# Altium PCB KNX-MultiExt.PcbDoc
Units mm, origin at the board's own origin, x right, y up, seen from the top; angles counter-clockwise.
Board outline 41.3 x 56.2 mm, 2 copper layers (Top Layer, Bottom Layer); 40 components, 27 nets, 123 pads, 29 vias.
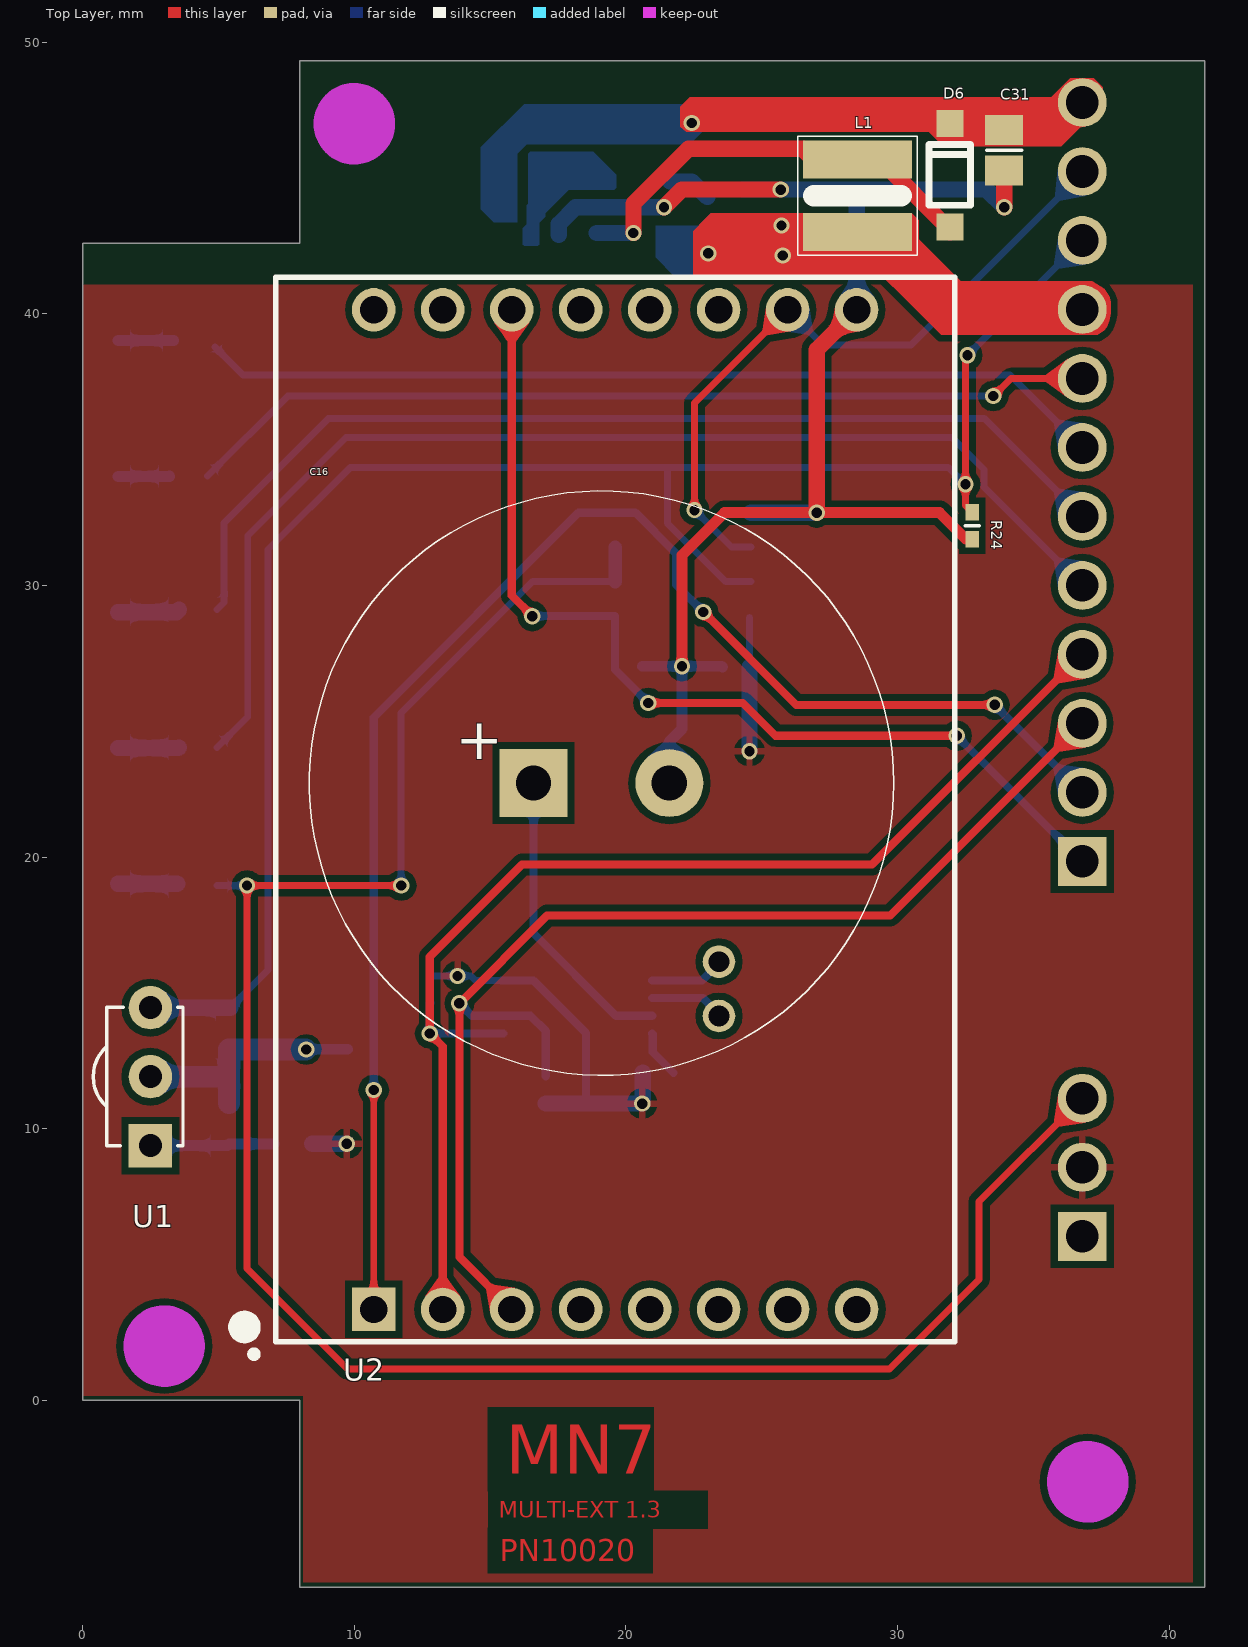
[diagram p0: Top Layer view]
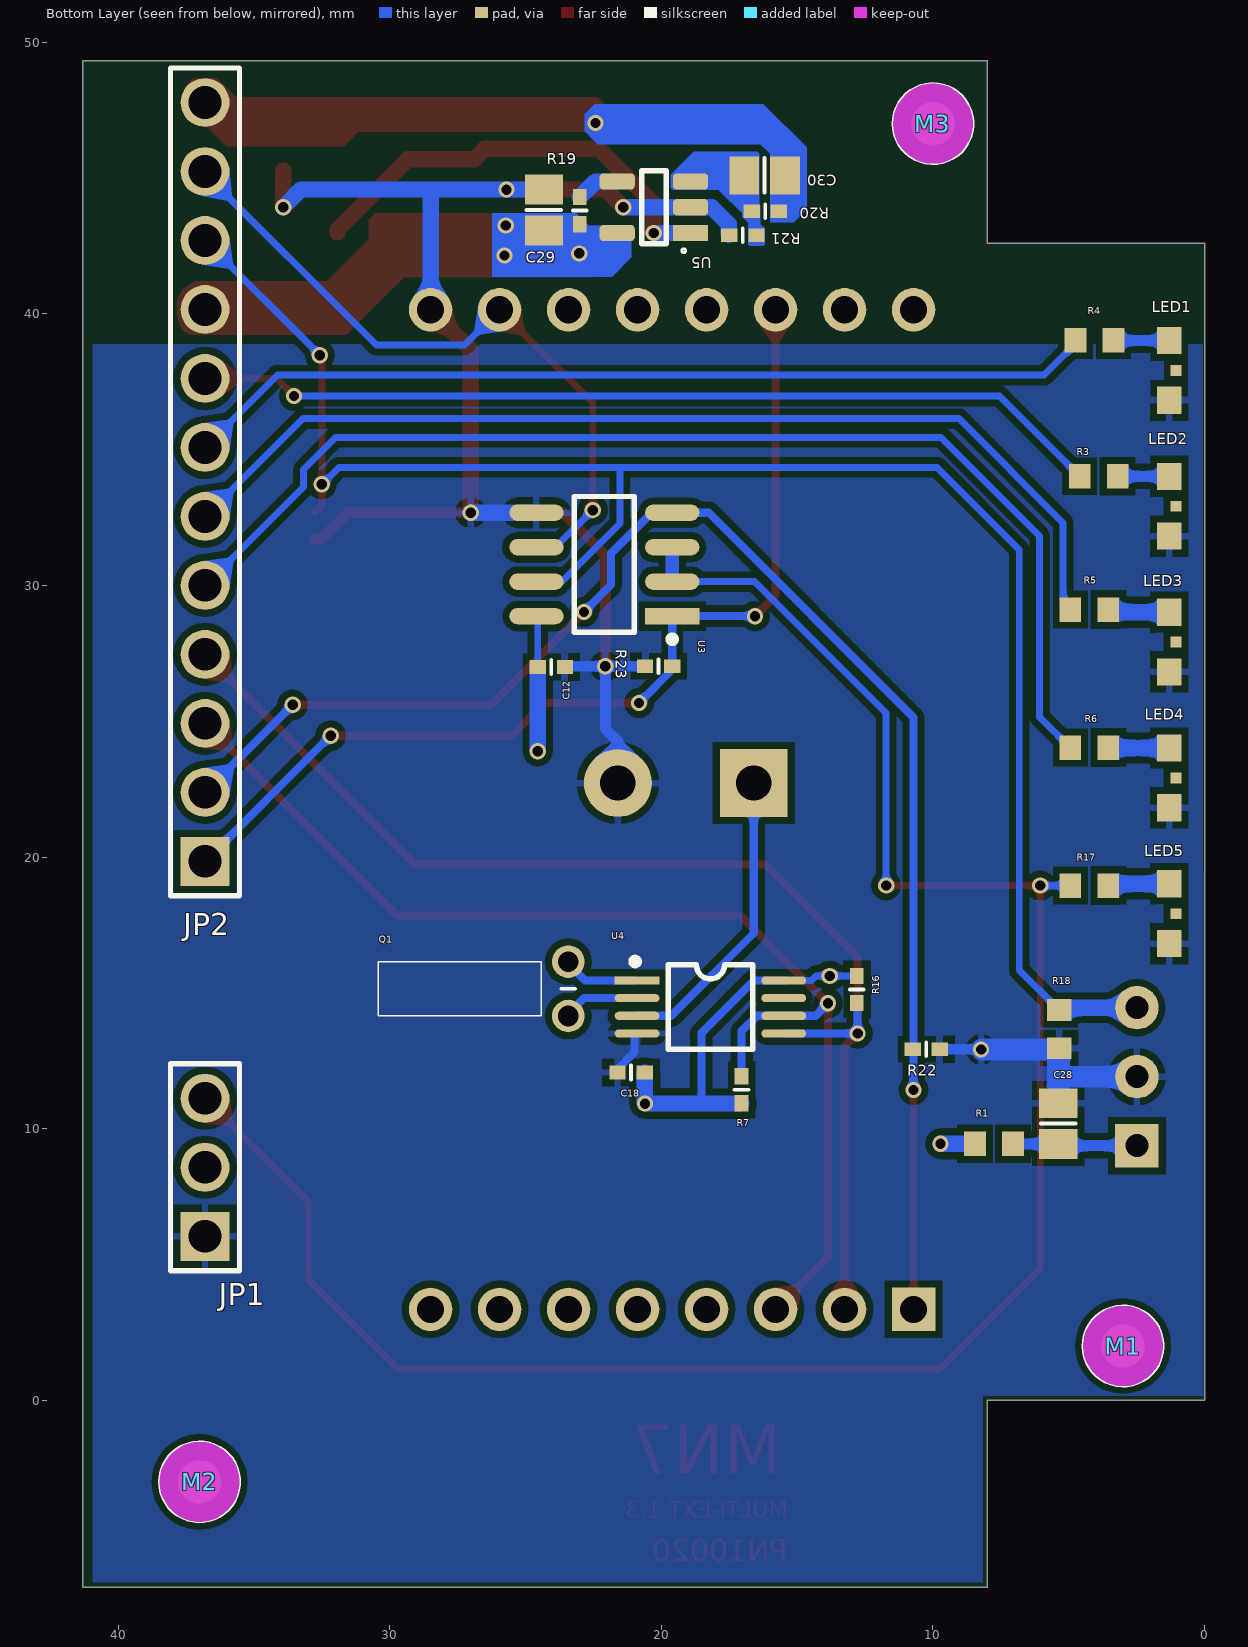
[diagram p1: Bottom Layer view, seen from below]
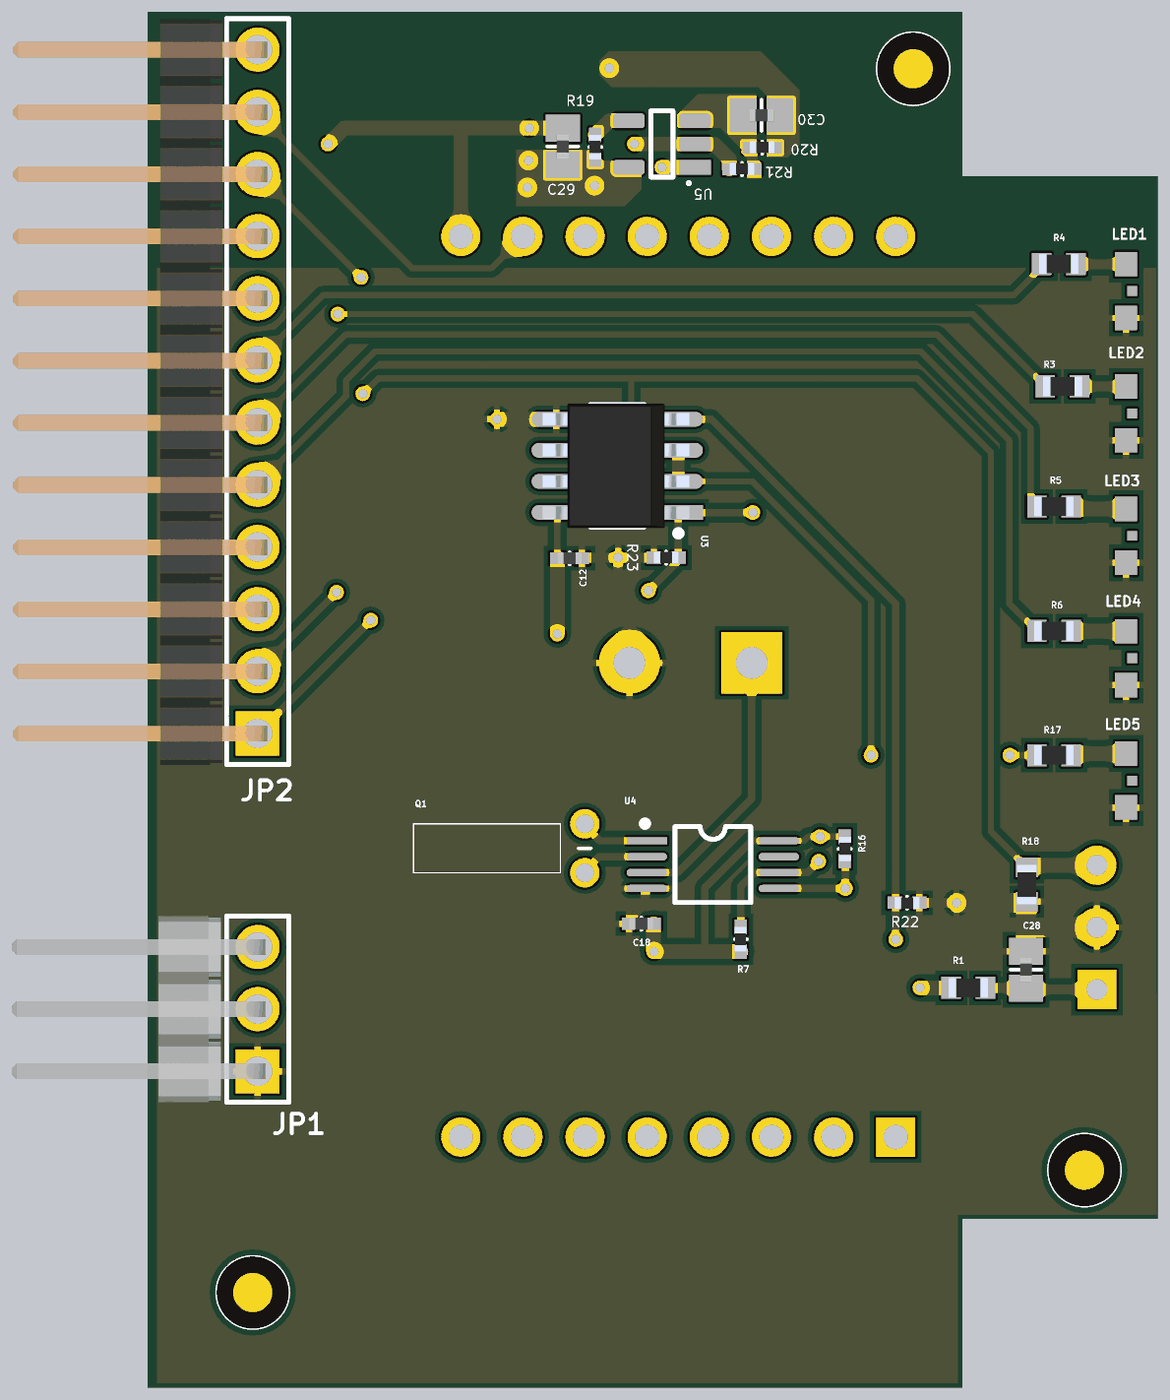
[diagram p2: 3D render of the assembled board from below, using the file's embedded part models]

## Layer stack, top to bottom
Top Solder: solder mask 0.0102, Solder Resist, Dk 3.5
Top Layer: signal copper 0.0356
Dielectric 1: dielectric 0.32, FR-4, Dk 4.8
Bottom Layer: signal copper 0.0356
Bottom Solder: solder mask 0.0102, Solder Resist, Dk 3.5

## Board outline
0,0 8,0 8,-6.883 41.304,-6.883 41.304,49.32 8,49.32 8,42.602 0,42.602

## Design rules (kind name [scope] priority, off if disabled: settings)
Clearance [All] p1: gap=0.254
ComponentClearance ComponentClearance_1 [(HasFootprint('KIMaip') AND HasFootprint('Goldcap_B'))] p1: gap=0 collisioncheckmode=3 verticalgap=0 showdistances=FALSE
ComponentClearance [All] p2: gap=0 collisioncheckmode=3 verticalgap=0 showdistances=FALSE
MinimumSolderMaskSliver [All] p1: minsoldermaskwidth=0.127
PolygonConnect [All] p1: connectstyle=Relief reliefconductorwidth=0.254 reliefentries=4 polygonreliefangle="90 Angle" airgapwidth=0.254
RoomDefinition KNX-MultiExt [InComponentClass('KNX-MultiExt')] p1: confinementstyle=ConfineIn formatcopy=TRUE lockcomponents=FALSE outline -2.8,-8.275 47.25,-8.275 47.25,51.425 -2.8,51.425
RoomDefinition KNX-MultiExt_2 [InComponentClass('KNX-MultiExt_2')] p2: confinementstyle=ConfineIn formatcopy=TRUE lockcomponents=FALSE outline -3.35,-9.775 45.925,-9.775 45.925,50.625 -3.35,50.625
RoutingVias [All] p1: holewidth=0.711 width=1.27 viastyle="Through Hole" minholewidth=0.25 minwidth=0.5 maxholewidth=0.711 maxwidth=1.27
SilkToBoardRegionClearance [(HasFootprint('Mark-3mm') AND IsEmbeddedBoard)] p1:
SilkToSilkClearance [All] p1: silktosilkclearance=0.2
SilkToSolderMaskClearance [IsPad] p1: minsilkscreentomaskgap=0.1 clearancetoexposedcopper=TRUE
SolderMaskExpansion [All] p1: expansion=0.102
Width [All] p1: maxlimit=1 minlimit=0.254 preferedwidth=0.6
25 further rules are at their usual default settings.

## Classes and differential pairs
component class KNX-MultiExt_2: C12 C16 C18 Q1 R7 R16 R18 R22 R23 R24 U2 U3 U4
component class KNX-MultiExt: C28 C29 C30 C31 D6 JP1 JP2 L1 LED1 LED2 LED3 LED4 LED5 M1 M2 M3 R1 R3 R4 R5 R6 R17 R19 R20 R21 U1 U5

## Components (designator, comment, footprint, x,y, rotation, side; value= is the part's Value field where it differs from the comment)
C12 "100nF25V_0402" C0402 24.05,27 r180 bottom
C16 "1F5_5V5_POL" Goldcap_B 19.1,22.725 r0 top locked
C18 "100nF25V_0402" C0402 21.114,12.069 r0 bottom
C28 "47u6V3_0805" C0805 5.388,10.189 r90 bottom
C29 "4u7F25V_0805_Murata" C0805 24.325,43.825 r90 bottom
C30 "82pF50V_0805" C0805 16.2,45.1 r180 bottom
C31 "4u7F25V_0805" C0805 33.925,46.025 r270 top
D6 "MBR0530T1G" SOD123 31.925,45.1 r90 top
JP1 "Plug_3_90_2.54" HDR1X3-DOWN 36.8,8.578 r90 bottom locked
JP2 "Plug_12_90_2.54" HDR1X12_2.54-Down 36.8,33.811 r90 bottom locked
L1 "15uH-WE-TPC" WE-TPC-3816 28.525,44.35 r90 top
LED1 "HSMG-120-Y" HSMA-120-OR 1.3,37.917 r270 bottom
LED2 "HSMG-120-GR" HSMA-120-G 1.3,32.917 r270 bottom
LED3 "HSMG-120-Y" HSMA-120-OR 1.3,27.917 r270 bottom
LED4 "HSMG-120-Y" HSMA-120-OR 1.3,22.917 r270 bottom
LED5 "HSMG-120-Y" HSMA-120-OR 1.3,17.917 r270 bottom
M1 "PasteMark" Mark-3mm 3,2 r180 bottom
M2 "PasteMark" Mark-3mm 37,-3 r180 bottom
M3 "PasteMark" Mark-3mm 10,47 r180 bottom
Q1 "Crystal_32k768Hz" VT-200 23.425,15.15 r180 bottom
R1 "47R_0603" R0603(1608) 7.75,9.45 r0 bottom
R3 "82R_0603" R0603(1608) 3.9,34.025 r0 bottom
R4 "82R_0603" R0603(1608) 4.05,39.025 r0 bottom
R5 "82R_0603" R0603(1608) 4.245,29.112 r0 bottom
R6 "82R_0603" R0603(1608) 4.245,24.032 r0 bottom
R7 "4k7_0402" R0402 17.05,11.434 r90 bottom
R16 "4k7_0402" R0402 12.8,15.125 r270 bottom
R17 "82R_0603" R0603(1608) 4.245,18.952 r0 bottom
R18 "0R_0603" R0603(1608) 5.354,13.667 r270 bottom
R19 "51k1_0402" R0402 23,43.8 r90 bottom
R20 "249k_0402" R0402 16.175,43.775 r180 bottom
R21 "13k3_0402" R0402 17,42.9 r180 bottom
R22 "47k_0402" R0402 10.25,12.925 r0 bottom
R23 "47k_0402" R0402 20.1,27.025 r180 bottom
R24 "47k_0402" R0402 32.75,32.2 r90 top
U1 "GP1UX301QS" IR-GP 2.492,11.917 r270 top
U2 "KIMaip" KIMaip 19.605,21.75 r90 top locked
U3 "ADM3483ARZ" SOIC8_N 22.1,30.775 r90 bottom
U4 "DS1339U-33" uSOP8 18.193,14.482 r270 bottom
U5 "LM2733XMF" PDSO-G5 20.275,43.925 r0 bottom

## Footprints (in the part's own frame and the unit in brackets; to place one, negate y for a bottom-side part, rotate by r counter-clockwise, add the part's x,y. Pads: shape width x height; smd on the part's side, far side on the other; paste and mask are expansions set on the pad)
C0402 [mm] "Chip Capacitor, Body 1.0x0.5mm, IPC High Density"
  rect 0.6x0.5 smd: 1(-0.5,0) 2(0.5,0)
  silkscreen extent 0,-0.25 0,0.25, body extent -0.5,-0.25 0.5,0.25, height 0.5
C0805 [mm] "Chip Capacitor, Body 2.0x1.3mm, IPC High Density"
  rect 1.1x1.4 smd: 1(-0.75,0) 2(0.75,0)
  silkscreen extent 0,-0.64 0,0.64, body extent -0.5,-0.25 0.5,0.25, height 0.5
Goldcap_B [mm] "Capacitor, Body 21.5x9.5mm, IPC High Density"
  rect 2.5x2.5 hole 1.3: 1(-2.5,0)
  round 2.5 hole 1.3: 2(2.5,0)
  silkscreen extent -10.75,-10.76 10.76,10.76, body extent -10.67,-10.73 10.75,10.73, height 8
HDR1X3-DOWN [mm] "Connector; Header; 3 Position"
  rect 1.8x1.8 hole 1.2: 1(-2.54,0)
  round 1.8 hole 1.2: 2(0,0) 3(2.54,0)
  silkscreen extent -3.81,-1.27 3.81,1.27, body extent -3.81,-0.31 3.81,10.05, height 2.57
HDR1X12_2.54-Down [mm] "Connector; Header; 11 Position"
  rect 1.8x1.8 hole 1.2: 1(-13.97,0)
  round 1.8 hole 1.2: 2(-11.43,0) 3(-8.89,0) 4(-6.35,0) 5(-3.81,0) 6(-1.27,0) 7(1.27,0) 8(3.81,0) 9(6.35,0) 10(8.89,0) 11(11.43,0) 12(13.97,0)
  silkscreen extent -15.24,-1.27 15.24,1.27, body extent -15.25,-0.38 15.23,9.98, height 2.62
HSMA-120-G [mm] "GREEN"
  rect 1x0.9 smd: 1(1.1,0) 2(-1.1,0)
  rect 0.4x0.4 smd: 3(0,0.25)
  body extent -0.8,-0.2 0.8,0.85, height 0.6
HSMA-120-OR [mm] "OR"
  rect 1x0.9 smd: 1(1.1,0) 2(-1.1,0)
  rect 0.4x0.4 smd: 3(0,0.25)
  body extent -0.8,-0.2 0.8,0.85, height 0.6
IR-GP [mm]
  rect 1.6x1.6 hole 0.85: 1(2.54,0)
  round 1.6 hole 0.85: 2(0,0) 3(-2.54,0)
  silkscreen extent -2.55,-2.11 2.55,1.2, body extent -2.54,-1.6 2.54,1.2, height 8
KIMaip [mm]
  rect 1.6x1.6 hole 1: 1(-18.4,8.89)
  round 1.6 hole 1: 2(-18.4,6.35) 3(-18.4,3.81) 4(-18.4,1.27) 5(-18.4,-1.27) 6(-18.4,-3.81) 7(-18.4,-6.35) 8(-18.4,-8.89) 9(18.4,-8.89) 10(18.4,-6.35) 11(18.4,-3.81) 12(18.4,-1.27) 13(18.4,1.27) 14(18.4,3.81) 15(18.4,6.35) 16(18.4,8.89)
  silkscreen extent -20.17,-12.5 19.6,13.95, body extent -19.6,-12.55 19.6,12.55, height 8.5
Mark-3mm [mm]
  round 1.6 smd paste-2: 0(0,0)
  Keep-Out Layer circle w2: c0,0 r0.5
  silkscreen extent -1.5,-1.5 1.5,1.5
PDSO-G5 [mm]
  rect 1.3x0.6 smd: 1(-1.35,0.95)
  rrect50% 1.3x0.6 smd: 2(-1.35,0) 3(-1.35,-0.95) 4(1.35,-0.95) 5(1.35,0.95)
  silkscreen extent -1.17,-1.35 0.45,1.67, body extent -0.85,-1.35 0.85,1.35, height 0.7
R0402 [mm] "Chip Resistor, Body 1.0x0.5mm"
  rect 0.6x0.5 smd: 1(-0.5,0) 2(0.5,0)
  silkscreen extent 0,-0.25 0,0.25, body extent -0.5,-0.24 0.5,0.26, height 0.4
R0603(1608) [mm] "Chip Resistor, 0603"
  rect 0.8x0.9 smd: 1(-0.7,0) 2(0.7,0)
  body extent -0.8,-0.4 0.8,0.4, height 0.5
SOD123 [mm]
  rect 1x1 smd: 1(1.905,0) 2(-1.905,0)
  silkscreen extent -1.1,-0.76 1.14,0.76, body extent -1.4,-0.85 1.4,0.88, height 1.4
SOIC8_N [mm] "SOIC, 8-Leads, Body 4.9x3.9mm, Pitch 1.27mm, IPC Medium Density"
  rect 0.6x2 smd: 1(-1.905,-2.5)
  oval 0.6x2 smd: 2(-0.635,-2.5) 3(0.635,-2.5) 4(1.905,-2.5) 5(1.905,2.5) 6(0.635,2.5) 7(-0.635,2.5) 8(-1.905,2.5)
  silkscreen extent -2.88,-2.62 2.5,1.1, body extent -2.54,-2.95 2.54,3.05, height 1.7
uSOP8 [mm] "Shrink Small Outline, Plastic, Thin; 8 Leads; Body Width 4.4 mm; Pitch 0.65 mm"
  rect 0.3x1.65 smd: 1(-0.975,-2.7)
  oval 0.3x1.65 smd: 2(-0.325,-2.7) 3(0.325,-2.7) 4(0.975,-2.7) 5(0.975,2.7) 6(0.325,2.7) 7(-0.325,2.7) 8(-0.975,2.7)
  silkscreen extent -1.8,-2.9 1.55,1.55, body extent -1.52,-1.52 1.52,1.52, height 1
VT-200 [mm] "Crystal, 32.768kHz"
  round 1.2 hole 0.762: 1(0,1) 2(0,-1)
  silkscreen extent -7,-1 0.25,1, body extent -6.98,-0.97 -0.98,1.02, height 2.09
WE-TPC-3816 [mm] "Chip , Body 5.7x6.4mm, IPC High Density"
  rect 1.4x4 smd: 1(-1.338,0) 2(1.338,0)
  silkscreen extent -2.2,-2.2 2.19,2.2, body extent -1.89,-1.9 1.91,1.9, height 1.7

## Part data
C12 C18: "AVX, X5R, 10%, 25V"
C16: "Panasonic, F series"
C28: "Kemet  C series, X5R, 20%, 6.3V"
C29: "GRM series, X5R, 10%, 25V"
C30: "C0G series, 5%, 50V"
C31: "TDK  C series, X7R, 10%, 25V"
D6: "Diode Schottky,2A,40V"
JP1: "Plug,-3-Pin"
JP2: "Plug, 11-Pin"
L1: "Coil, 15uH, 0.65A"
LED1 LED3 LED4 LED5: "LED, 90°, yellow"
LED2: "LED, 90°, green"
M1 M2 M3: library part Mark
Q1: "Crystal, 32.768kHz"
R1 R3 R4 R5 R6 R17: "Vishay, CRCW series, 100mW, 1%"
R7 R16 R19 R20 R21 R22 R23 R24: "Vishay CRCW series, 63mW, 1%"
R18: "Vishay, CRCW series, 100mW"
U1: "IR reseiver"
U2: "PoE, 12V"
U3: "Transceiver, RS485/422"
U4: "RTC"
U5: "TI, buck boost converter, 1A max"

## Via types
v1: diameter 0.6, hole 0.381, Top Layer to Bottom Layer, 29 vias

## Nets (pads, with @x,y where several pads share a name; then routed paths per layer and width w, separated by ;. In a path a pad name is that pad's centre, name@x,y a point inside that pad or via, vN(x,y) a via of type N, cw(c..) or ccw(c..) an arc to the next point about the centre after c; other vN are vias at no path point)
GND_EXT: C12.2 C16.2 C18.2 C28.2 C29.2 C31.2 JP1.1 LED1.1 LED2.1 LED3.1 LED4.1 LED5.1 R18.2 R21.1 R22.1 R23.1 R24.1 U1.2 U2.9 U3.5 U4.4 U5.2 | length 69.5
  Top Layer w0.4: v1(22.062,27.025) 22.062,31.112 23.63,32.68 v1(27.02,32.68) 31.545,32.68 32.525,31.7 R24.1
  Top Layer w0.6: v1(21.4,43.925) 22.05,44.575 v1(25.7,44.575) ; v1(27.02,32.68) 27.02,38.675 U2.9 ; v1(33.925,43.925) C31.2
  Bottom Layer w0.3: U4.4@20.968,13.507 20.987,13.488 20.987,12.823 C18.2@21.749,12.061
  Bottom Layer w0.4: v1@8.204,12.918 8.211,12.925 R22.1 ; R23.1 v1(22.062,27.025) ; C16.2 21.6,24.25 22.062,24.712 v1(22.062,27.025) ; C12.2 23.525,27.025 v1(22.062,27.025)
  Bottom Layer w0.6: R21.1@17.521,42.917 17.521,43.304 18.142,43.925 U5.2 v1(21.4,43.925) ; C29.2 v1(25.7,44.575) 28.525,44.575 ; U3.5 v1(27.02,32.68) ; U2.9 28.495,44.545 28.525,44.575 ; v1(33.925,43.925) 33.275,44.575 28.525,44.575
  Bottom Layer w0.8: U1.2 5.388,11.917 ; C28.2 5.388,11.917 ; v1@8.204,12.918 5.388,12.918 5.388,11.917
  other v1: 8.229,12.917
NetC12_1: C12.1 C18.1 JP1.2 R1.2 R7.1 R16.1 U3.8 U4.8 | length 20.1
  Bottom Layer w0.254: R16.1 14.3,15.625 14.468,15.457 U4.8@15.418,15.457 ; C12.1 U3.8@24.55,28.82
  Bottom Layer w0.3: U4.8@15.418,15.457 U4.8 16.593,15.457 18.525,13.525 18.525,10.926
  Bottom Layer w0.6: R1.2 v1(9.725,9.45) ; R7.1@17.05,10.926 18.525,10.926 20.606,10.926 20.614,10.934 C18.1 ; v1@24.55,23.925 C12.1
  other v1: 20.6,10.925 13.8,15.625 24.55,23.9
NetC16_1: C16.1 U4.3 | length 11.2
  Bottom Layer w0.3: C16.1 16.6,17.195 19.639,14.157 U4.3 U4.3@20.968,14.157
NetC28_1: C28.1 R1.1 U1.1 | length 4.5
  Bottom Layer w0.4: U1.1 C28.1@5.326,9.377 ; C28.1 7.039,9.439 R1.1
NetC29_1: C29.1 JP2.9 L1.1 R19.1 U5.5 | length 9.4
  Top Layer w1: L1.1@28.55,42.975 31.364,40.161 JP2.9
  other v1: 25.775,42.15 23.025,42.225 25.725,43.25
NetC30_1: C30.1 R20.1 R21.2 U5.3 | length 4.2
  Bottom Layer w0.3: R21.2 16.5,43.6 R20.1
  Bottom Layer w0.6: R20.1 16.95,44.05 C30.1 ; C30.1@17.1,44.875 U5.3
NetC30_2: C30.2 C31.1 D6.1 JP2.12 R20.2 | length 23.7
  Top Layer w0.4: D6.1@31.825,47.025 32.05,46.8 35.819,46.8 JP2.12
  Top Layer w0.6: v1(22.425,47.025) D6.1@31.825,47.025
  Bottom Layer w0.4: C30.2 C30.2@15.675,44.875
  Bottom Layer w0.5: R20.2 C30.2@15.675,44.875
  Bottom Layer w0.6: C30.2@15.646,45.767 15.646,45.971 16.7,47.025 v1(22.425,47.025)
NetD6_2: D6.2 L1.2 U5.1 | length 16.2
  Top Layer w0.6: v1(20.275,42.975) 20.275,44.05 22.3,46.075 26.5,46.075 26.887,45.688 L1.2 29.333,45.688 31.925,43.096 D6.2@31.925,42.995
  Bottom Layer w0.6: U5.1 v1(20.275,42.975)
NetJP1_3: JP1.3 R17.2 U3.2 U3.3 | length 76.5
  Top Layer w0.254: v1(11.725,18.952) v1(6.05,18.952) 6.05,4.85 9.75,1.15 29.7,1.15 33,4.45 33,7.318 JP1.3
  Bottom Layer w0.254: R17.2 v1(6.05,18.952) ; v1(11.725,18.952) 11.725,25.3 16.565,30.14 U3.2
  Bottom Layer w0.5: U3.2 U3.3
NetJP2_1: JP2.1 R23.2 U2.14 U3.1 | length 36.7
  Top Layer w0.3: U2.14 15.795,29.63 v1(16.555,28.87) ; v1(20.825,25.675) 24.3,25.675 25.509,24.466 v1(32.175,24.466)
  Bottom Layer w0.3: v1(16.555,28.87) U3.1 R23.2 19.6,26.904 20.825,25.679 v1(20.825,25.675) ; v1(32.175,24.466) JP2.1
NetJP2_2: JP2.2 R22.2 U2.1 U3.4 | length 56
  Top Layer w0.254: U2.1 v1(10.715,11.425)
  Top Layer w0.3: U2.1 U2.1@10.725,3.34 ; v1(22.85,29.025) 26.269,25.606 v1(33.575,25.606)
  Bottom Layer w0.3: v1(10.715,11.425) 10.715,25.14 18.255,32.68 U3.4 20.345,32.68 21.85,31.175 21.85,30.025 v1(22.85,29.025) ; v1(33.575,25.606) JP2.2
NetJP2_3: JP2.3 R7.2 U2.3 U4.6 | length 44.5
  Top Layer w0.3: U2.3 13.867,5.278 v1(13.867,14.617) 17.1,17.85 29.729,17.85 JP2.3
  Bottom Layer w0.3: v1(13.867,14.617) 14.327,14.157 U4.6 16.486,14.157 17.05,13.593 R7.2
NetJP2_4: JP2.4 R16.2 U2.2 U4.5 | length 45.7
  Top Layer w0.3: U2.2 13.255,13.027 v1(12.775,13.507) 12.775,16.325 16.175,19.725 29.064,19.725 JP2.4
  Bottom Layer w0.3: R16.2 12.775,14.6 v1(12.775,13.507) U4.5
NetJP2_5: JP2.5 R6.2 | length 43.1
  Bottom Layer w0.254: R6.2 6.075,25.162 6.075,31.825 9.7,35.45 32,35.45 33.181,34.269 33.181,33.62 JP2.5
NetJP2_6: JP2.6 R5.2 | length 38
  Bottom Layer w0.254: R5.2 5.207,29.374 5.207,32.307 9.042,36.142 33.199,36.142 JP2.6
NetJP2_7: JP2.7 R4.2 | length 33.5
  Bottom Layer w0.254: R4.2@4.875,38.775 5.904,37.746 34.135,37.746 JP2.7
NetJP2_8: JP2.8 R3.2 | length 33.7
  Top Layer w0.254: v1(33.525,36.975) 34.171,37.621 JP2.8
  Bottom Layer w0.254: R3.2 7.55,36.975 v1(33.525,36.975)
NetJP2_10: JP2.10 R18.1 R24.2 U1.3 U3.7 | length 65.6
  Top Layer w0.254: v1(32.575,38.476) 32.5,38.401 v1(32.5,33.725) 32.5,32.95 R24.2
  Bottom Layer w0.254: R18.1@5.444,14.457 6.825,15.838 6.825,31.325 9.85,34.35 21.525,34.35 ; U3.7 23.66,30.14 21.525,32.275 21.525,34.35 ; v1(32.5,33.725) 31.875,34.35 21.525,34.35 ; v1(32.575,38.476) JP2.10
  Bottom Layer w0.4: R18.1 R18.1@5.444,14.457
  Bottom Layer w0.6: U1.3 R18.1@5.444,14.457
NetJP2_11: JP2.11 U2.10 U3.6 | length 25.6
  Top Layer w0.254: v1(22.525,32.775) 22.525,36.72 U2.10
  Bottom Layer w0.254: v1(22.525,32.775) 23.89,31.41 U3.6 ; U2.10 27.255,38.85 30.493,38.85 JP2.11@36.884,45.241
NetLED1_2: LED1.2 R4.1 | length 2.1
  Bottom Layer w0.4: LED1.2 3.342,39.017 R4.1
NetLED2_2: LED2.2 R3.1 | length 1.9
  Bottom Layer w0.4: LED2.2 3.192,34.017 R3.1
NetLED3_2: LED3.2 R5.1 | length 2.3
  Bottom Layer w0.6: LED3.2 3.45,29.017 R5.1
NetLED4_2: LED4.2 R6.1 | length 2.3
  Bottom Layer w0.6: LED4.2 3.53,24.017 R6.1
NetLED5_2: LED5.2 R17.1 | length 2.2
  Bottom Layer w0.6: LED5.2 R17.1@3.48,19.017
NetQ1_1: Q1.1 U4.1 | length 2.8
  Bottom Layer w0.3: U4.1@20.968,15.457 22.807,15.457 Q1.1@23.5,16.15
NetQ1_2: Q1.2 U4.2 | length 2.8
  Bottom Layer w0.3: U4.2@20.968,14.807 22.843,14.807 Q1.2@23.5,14.15
NetR19_2: R19.2 U5.4 | length 1.6
  Bottom Layer w0.6: U5.4 22.425,44.875 R19.2
pads on no net: LED1.3 LED2.3 LED3.3 LED4.3 LED5.3 M1.0 M2.0 M3.0 U2.4 U2.5 U2.6 U2.7 U2.8 U2.11 U2.12 U2.13 U2.15 U2.16 U4.7

## Polygon pours and split planes (outlines as drawn)
GND_EXT on Bottom Layer "GND" (solid, pour order 4): 0.05,0.175 8.175,0.175 8.175,-6.7 40.925,-6.7 40.925,38.175 40.925,38.875 0.075,38.875
NetC12_1 on Top Layer "3V3" (solid, pour order 3): 0,0.175 8.125,0.175 8.125,-6.7 40.875,-6.7 40.875,38.175 40.875,41.075 0.027,41.075

## Other copper
Top Layer:
  region net NetC29_1: 22.475,41.35 29.925,41.35 30.775,42.2 30.775,43.45 30.525,43.7 23.441,43.7 23.125,43.7 22.901,43.476 22.475,43.05
  region net NetC29_1: 28.075,42.75 31.602,39.223 37.37,39.223 37.617,39.388 37.693,39.502 37.795,39.747 37.85,40.026 37.85,40.443 37.787,40.649 37.6,40.925 37.173,41.2 32.325,41.2 30.775,42.75
  region net NetC30_2: 22.221,46.7 31.15,46.7 31.675,46.175 36.025,46.175 37.55,47.7 37.55,48.35 37.225,48.675 36.35,48.675 35.65,47.975 22.35,47.975 22,47.625 22,46.889
  text "MN7" at 15.575,-2.7 h1.8
  text "MULTI-EXT 1.3" at 15.325,-4.325 h0.6
  text "PN10020" at 15.35,-5.925 h0.8
Bottom Layer:
  region net NetC29_1: 21.1,43.25 21.1,42.075 21.8,41.375 26.225,41.375 26.225,43.7 23.125,43.7 22.675,43.25
  region net NetC30_2: 15.125,43.375 14.65,43.85 14.65,46.125 16.25,47.725 22.45,47.725 22.825,47.35 22.825,46.725 22.35,46.25 16.35,46.25 16,45.9 16,43.375
  region net NetC30_1: 16.25,42.5 16.75,42.5 16.8,42.55 16.8,43.35 17.025,43.575 17.025,43.7 17.9,44.575 19.575,44.575 19.65,44.65 19.65,45.125 18.8,45.975 16.475,45.975 16.4,45.9 16.4,44.05 16.35,44 16.35,43.3 16.2,43.15 16.2,42.55

## Silkscreen, mask and mechanical layers (free items; w line width, h text height)
Top Solder:
  text "MN7" at 15.575,-2.7 h1.8
  text "MULTI-EXT 1.3" at 15.325,-4.325 h0.6
  text "PN10020" at 15.35,-5.925 h0.8
Outline:
  the board outline again, w0.254

## Dimensions
41.304,-6.883 to 41.304,49.32 on Measuring
8,49.32 to 41.304,49.32 on Measuring
0,42.602 to 8,49.32 on Measuring
8,49.32 to 0,42.602 on Measuring
0,0 to -0.381,42.602 on Measuring

## Text inside footprints (layer, text, board x,y; h text height)
C16: Top Overlay "+" at 13.725,23.6 h1.52